# Altium PCB PCB1.PcbDoc
Units mil, origin at the board's own origin, x right, y up, seen from the top; angles counter-clockwise.
Board outline 6000 x 4000 mil, 2 copper layers (Top Layer, Bottom Layer); 57 components, 53 nets, 324 pads, 102 vias.
Unrouted connection lines stored in the file: 9.
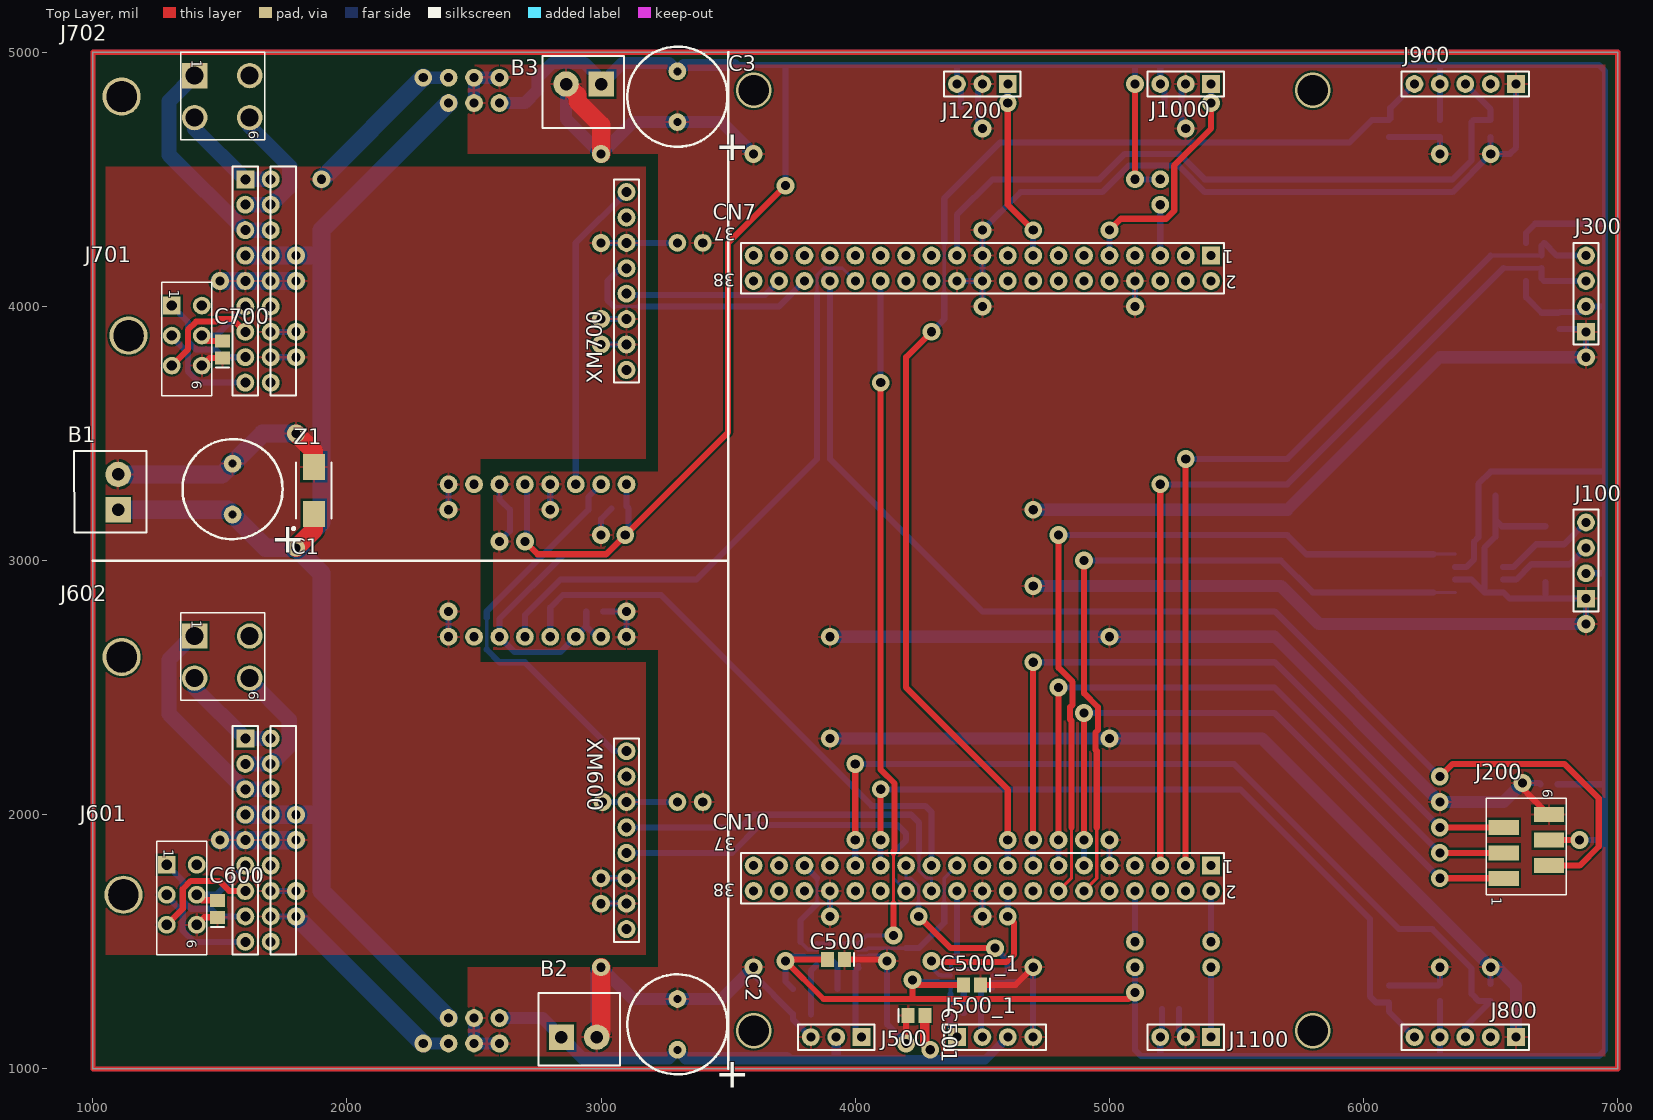
[diagram p0: Top Layer view]
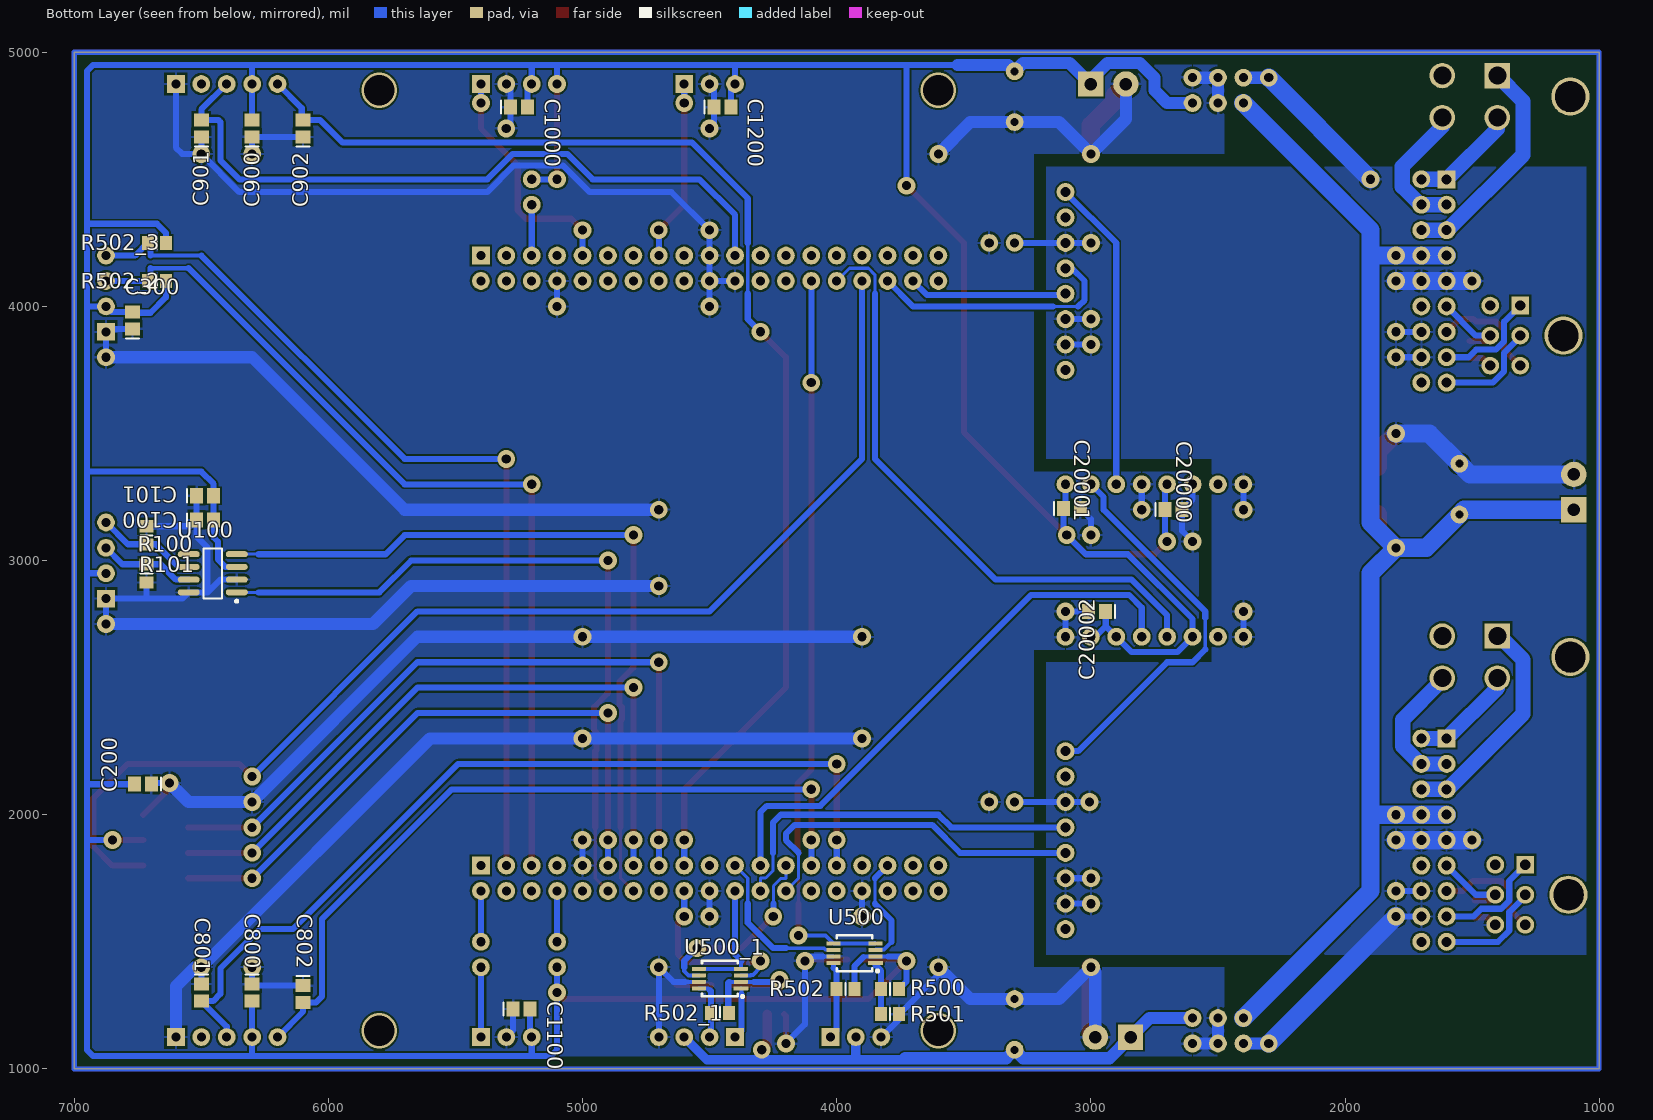
[diagram p1: Bottom Layer view, seen from below]
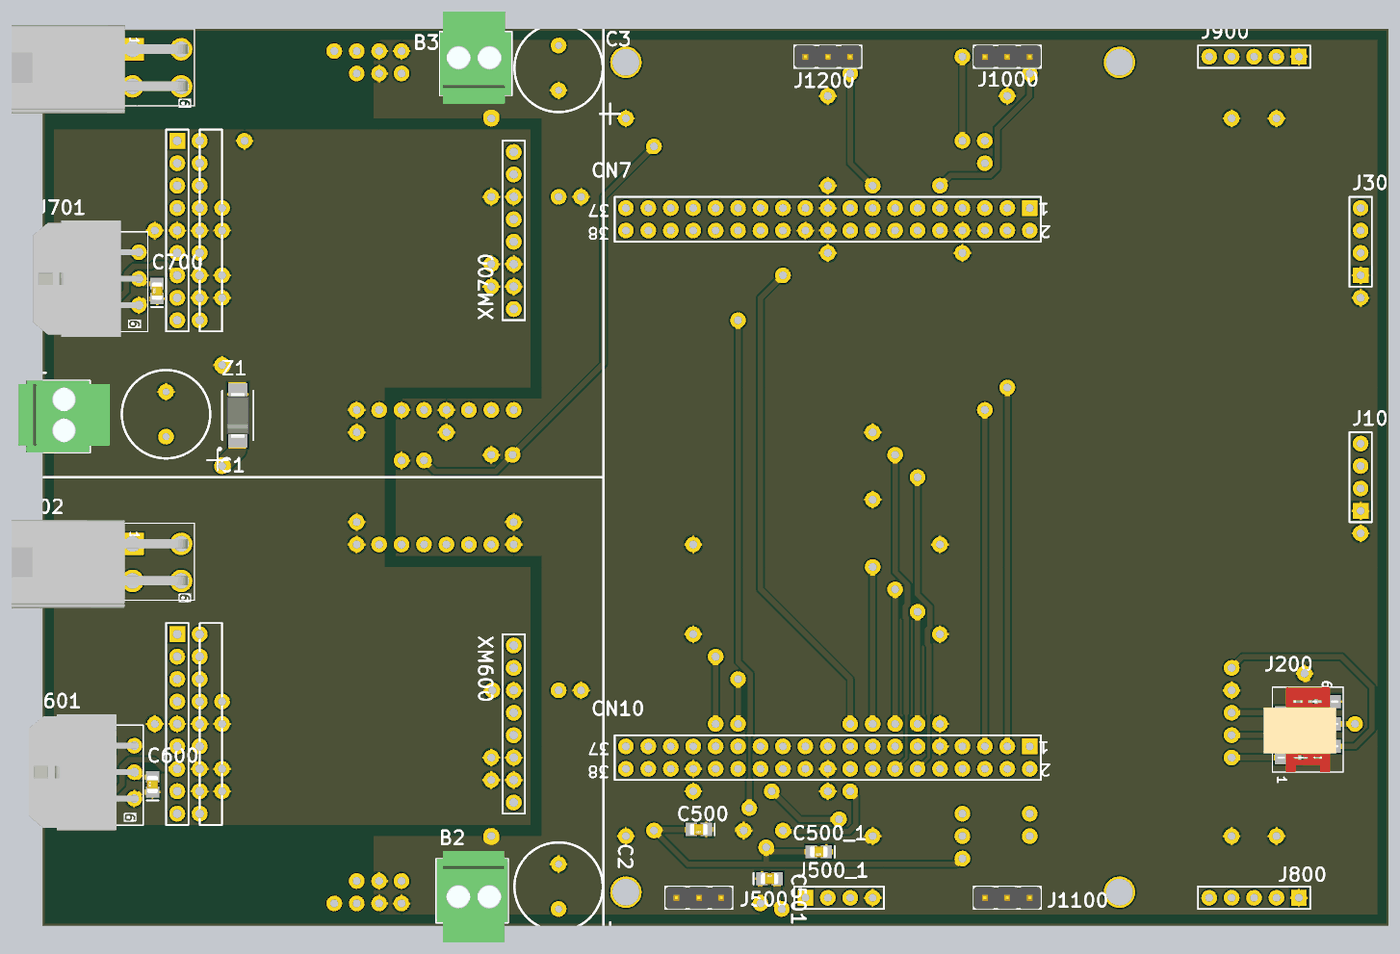
[diagram p2: 3D render of the assembled board from above, using the file's embedded part models]
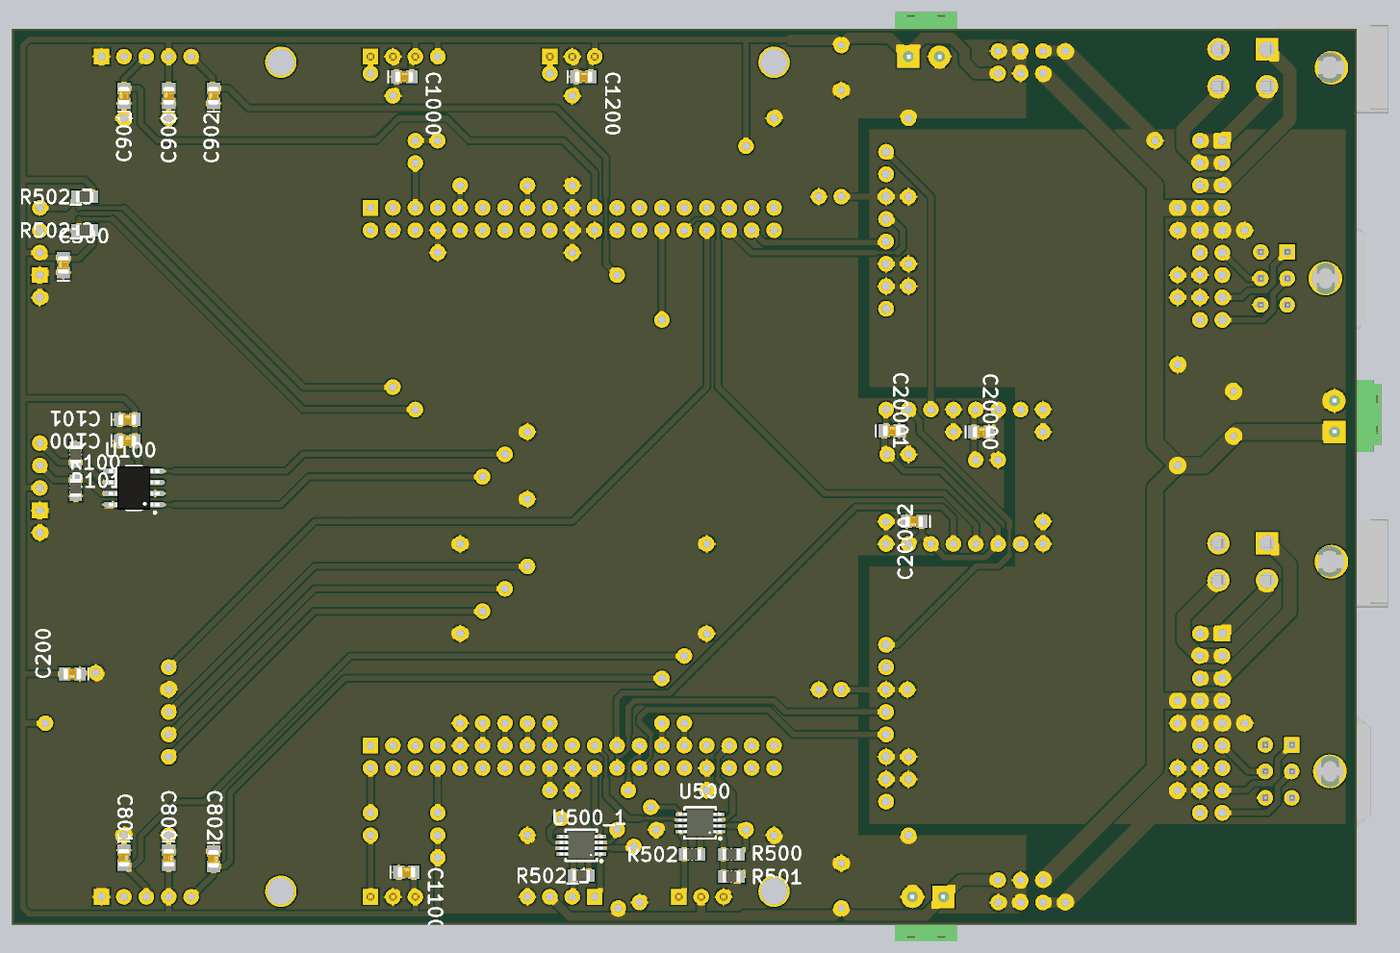
[diagram p3: 3D render of the assembled board from below, using the file's embedded part models]

## Layer stack, top to bottom
Top Solder: solder mask 0.4, Solder Resist, Dk 3.5
Top Layer: signal copper 1.4
Dielectric 1: dielectric 12.6, FR-4, Dk 4.8
Bottom Layer: signal copper 1.4
Bottom Solder: solder mask 0.4, Solder Resist, Dk 3.5

## Board outline
1000,1000 7000,1000 7000,5000 1000,5000

## Design rules (kind name [scope] priority, off if disabled: settings)
Clearance [All] p1: gap=8
PolygonConnect [All] p1: connectstyle=Relief reliefconductorwidth=10 reliefentries=4 polygonreliefangle="90 Angle" airgapwidth=10
RoutingVias [All] p1: holewidth=28 width=50 viastyle="Through Hole" minholewidth=6 minwidth=10 maxholewidth=5000 maxwidth=5000
SolderMaskExpansion [All] p1: expansion=4
Width [All] p1: maxlimit=1000 minlimit=10 preferedwidth=20
30 further rules are at their usual default settings.

## Classes and differential pairs
component class Feuille1: B1 B2 B3 C1 C2 C3 C100 C101 C200 C300 C500 C600 C700 C800 C801 C802 C900 C901 C902 CN7 CN10 J100 J200 J300 J500 J601 J602 J701 J702 J800 J900 J1000 J1100 J1200 R100 R101 R500 R501 R502 U100 U500 XM600 XM700 Z1

## Components (designator, comment, footprint, x,y, rotation, side; value= is the part's Value field where it differs from the comment)
B1 "1776275-2" BORNIER_2V_3.5MM 1100,3201 r90 top
B2 "1776275-2" BORNIER_2V_3.5MM 2845,1125 r0 top (schematic designator B3)
B3 "1776275-2" BORNIER_2V_3.5MM 3000,4875 r180 top (schematic designator B2)
C1 "1000µF" C_10mm 1550,3281 r270 top
C2 "1000µF" C_10mm 3300,1175 r270 top (schematic designator C3)
C3 "1000µF" C_10mm 3300,4825 r270 top (schematic designator C2)
C100 "1µF" C0805_N 6485,3160 r180 bottom
C101 "100nF" C0805_N 6485,3255 r180 bottom
C200 "1µF" C0805_N 6730,2120 r0 bottom
C300 "1µF" C0805_N 6770,3945 r90 bottom
C500 "100nF" C0805_N 3925,1430 r180 top
C500_1 "100nF" C0805_N 4460,1330 r180 top (schematic designator C500)
C501 "1µF" C0805_N 4240,1210 r0 top (schematic designator C300)
C600 "1µF" C0805_N 1490,1630 r90 top
C700 "1µF" C0805_N 1510,3830 r90 top
C800 "100nF" C0805_N 6300,1300 r270 bottom
C801 "100nF" C0805_N 6500,1300 r270 bottom
C802 "100nF" C0805_N 6100,1295 r270 bottom
C900 "100nF" C0805_N 6300,4700 r90 bottom
C901 "100nF" C0805_N 6500,4700 r90 bottom
C902 "100nF" C0805_N 6100,4700 r90 bottom
C1000 "1µF" C0805_N 5250,4785 r180 bottom (schematic designator C300)
C1100 "1µF" C0805_N 5240,1235 r180 bottom (schematic designator C300)
C1200 "1µF" C0805_N 4450,4785 r180 bottom (schematic designator C300)
C20000 "100nF" C0805_N 2675,3200 r180 bottom (schematic designator C500)
C20001 "100nF" C0805_N 3075,3205 r180 bottom (schematic designator C500)
C20002 "100nF" C0805_N 2975,2800 r0 bottom (schematic designator C500)
CN7 "SSW-119-01-T-D" "CONN RCPT .100\" 38POS DUAL TIN" 5400,4200 r180 top
CN10 "SSW-119-01-T-D" "CONN RCPT .100\" 38POS DUAL TIN" 5400,1800 r180 top
J100 "MC34645" HDR1X4 6875,2850 r90 top
J200 "partNo" 690367280676 6640,1875 r270 top
J300 "MC34645" HDR1X4 6875,3900 r90 top
J500 "0022053031" HDR1X3 4025,1125 r180 top
J500_1 "MC34645" HDR1X4 4400,1125 r0 top (schematic designator J100)
J601 "43045-0600" 43045-0600 1350,1685 r270 top
J602 "39-30-0040" 39-30-0040 1460,2585 r270 top
J701 "43045-0600" 43045-0600 1370,3885 r270 top
J702 "39-30-0040" 39-30-0040 1460,4790 r270 top
J800 "826949-5" HDR1X5 6600,1125 r180 top
J900 "826949-5" HDR1X5 6600,4875 r180 top
J1000 "0022053031" HDR1X3 5400,4875 r180 top
J1100 "0022053031" HDR1X3 5400,1125 r180 top
J1200 "0022053031" HDR1X3 4600,4875 r180 top
R100 "60" R0805_N 6715,2950 r90 bottom
R101 "60" R0805_N 6715,3099.57 r90 bottom
R500 "10k" R0805_N 3790,1315 r180 bottom
R501 "10k" R0805_N 3790,1215 r0 bottom
R502 "10k" R0805_N 3965,1315 r180 bottom
R502_1 "10k" R0805_N 4460,1220 r180 bottom (schematic designator R502)
R502_2 "10k" R0805_N 6675,4100 r180 bottom (schematic designator R502)
R502_3 "10k" R0805_N 6675,4250 r180 bottom (schematic designator R502)
U100 "MCP2551-I/SN" SO8_N 6455,2950 r0 bottom
U500 "MAX485CUA+" MMAX-8 3930,1455 r0 bottom
U500_1 "MAX485CUA+" MMAX-8 4460,1355 r0 bottom (schematic designator U500)
XM600 "380200" 380200_goldo 3100,1500 r90 top
XM700 "380200" 380200_goldo 3100,3700 r90 top
Z1 "SMBJ54A" "SMA Diode (DO-214AA)" 1870,3276 r90 top

## Footprints (in the part's own frame and the unit in brackets; to place one, negate y for a bottom-side part, rotate by r counter-clockwise, add the part's x,y. Pads: shape width x height; smd on the part's side, far side on the other; paste and mask are expansions set on the pad)
39-30-0040 [mm] "4 pins, straight"
  round 3.81 hole 3 slot 3.1 at 0 deg: 0(-0.9,-8.8)
  rect 2.54x2.54 hole 1.8: 1(-3,-1.5)
  round 2.54 hole 1.8: 2(-3,4) 3(1.2,-1.5) 4(1.2,4)
  silkscreen extent -5.33,-2.9 3.4,5.5, body extent -5.72,-15.19 4.28,4.74, height 11.4
43045-0600 [mm] "6 pins, straight"
  round 3.81 hole 3 slot 3.1 at 0 deg: 0(0,-5.825)
  rect 1.778x1.778 hole 1.02: 1(-3,-1.5)
  round 1.778 hole 1.02: 2(-3,1.5) 3(0,-1.5) 4(0,1.5) 5(3,-1.5) 6(3,1.5)
  silkscreen extent -5.33,-2.5 6,2.5, body extent -6.57,-10.45 6.58,1.79, height 9.83
380200_goldo [mm] "MAXON"
  rect 1.8x1.8 hole 1: 1(20.32,38.1)
  round 1.8 hole 1: 2(20.32,35.56) 3(17.78,38.1) 4(17.78,35.56) 5(15.24,38.1) 6(15.24,35.56) 7(12.7,38.1) 8(12.7,35.56) 9(10.16,38.1) 10(10.16,35.56) 11(7.62,38.1) 12(7.62,35.56) 13(5.08,38.1) 14(5.08,35.56) 15(2.54,38.1) 16(2.54,35.56) 17(0,38.1) 18(0,35.56) 19(1.27,0) 20(3.81,0) 21(6.35,0) 22(8.89,0) 23(11.43,0) 24(13.97,0) 25(16.51,0) 26(19.05,0)
  silkscreen extent -1.27,-1.27 21.59,39.37, body extent -1.27,-1.27 21.59,39.37
690367280676 [mm] "without Latch, 6 pins, SMT, straight"
  rect 1.5x3 smd: 1(3.175,-2.25) 2(1.905,2.25) 3(0.635,-2.25) 4(-0.635,2.25) 5(-1.905,-2.25) 6(-3.175,2.25)
  silkscreen extent -4.81,-4 4.81,4, body extent -4.81,-5 4.81,3.5, height 5.75
BORNIER_2V_3.5MM [mm]
  rect 2.54x2.54 hole 1.25: 1(-0.025,0)
  round 2.54 hole 1.25: 2(3.5,0)
  silkscreen extent -2.31,-2.82 5.84,4.39, body extent -2.27,-5.08 5.83,5.32, height 21.81
C0805_N [mm] "Chip Capacitor, Body 2.0x1.3mm, IPC Medium Density"
  rect 1.3x1.5 smd: 1(-0.85,0) 2(0.85,0)
  silkscreen extent -1.8,-0.65 -1.8,0.65, body extent -0.99,-0.63 1.01,0.63, height 0.8
C_10mm [mil]
  round 70 hole 31.5: 1(-100,0) 2(100,0)
  silkscreen extent -197,-197 197,197, body extent -196,-195 196,197, height 689
"CONN RCPT .100\" 38POS DUAL TIN" [mil]
  rect 70x70 hole 35.43: 1(0,0)
  round 70 hole 35.43: 2(0,100) 3(100,0) 4(100,100) 5(200,0) 6(200,100) 7(300,0) 8(300,100) 9(400,0) 10(400,100) 11(500,0) 12(500,100) 13(600,0) 14(600,100) 15(700,0) 16(700,100) 17(800,0) 18(800,100) 19(900,0) 20(900,100) 21(1000,0) 22(1000,100) 23(1100,0) 24(1100,100) 25(1200,0) 26(1200,100) 27(1300,0) 28(1300,100) 29(1400,0) 30(1400,100) 31(1500,0) 32(1500,100) 33(1600,0) 34(1600,100) 35(1700,0) 36(1700,100) 37(1800,0) 38(1800,100)
  silkscreen extent -50,-50 1850,150
HDR1X3 [mil]
  rect 70x70 hole 35.43: 1(0,0)
  round 70 hole 35.43: 2(100,0) 3(200,0)
  silkscreen extent -50,-50 250,50, body extent -50,-50 250,50, height 398
HDR1X4 [mil]
  rect 70x70 hole 35.43: 1(0,0)
  round 70 hole 35.43: 2(100,0) 3(200,0) 4(300,0)
  silkscreen extent -50,-50 350,50
HDR1X5 [mil]
  rect 70x70 hole 35.43: 1(0,0)
  round 70 hole 35.43: 2(100,0) 3(200,0) 4(300,0) 5(400,0)
  silkscreen extent -50,-50 450,50
MMAX-8 [mm]
  rrect30% 1.5x0.4 smd: 1(-2.1,0.975)
  rrect30% 1.4x0.4 smd: 2(-2.1,0.325) 3(-2.1,-0.325) 4(-2.1,-0.975) 5(2.1,-0.975) 6(2.1,-0.325) 7(2.1,0.325)
  rrect20% 1.4x0.4 smd: 8(2.1,0.975)
  silkscreen extent -2.41,-1.78 1.78,1.9, body extent -2.46,-1.5 2.46,1.5, height 1.1
R0805_N [mm] "Chip Resistor, Body 2.0x1.3mm, IPC Medium Density"
  rect 1.2x1.4 smd: 1(-0.9,0) 2(0.9,0)
  silkscreen extent 0,-0.6 0,0.6, body extent -1.07,-0.7 1.07,0.7, height 0.65
"SMA Diode (DO-214AA)" [mm] "Case DO-214AA"
  rect 2.6x2.2 smd: 1(2.35,0) 2(-2.35,0)
  silkscreen extent -3.93,-1.78 2.79,2.16, body extent -2.8,-1.46 2.79,1.46, height 2.41
SO8_N [mm] "8-Pin Small Outline Integrated Circuit 1.27 mm Pitch, IPC Medium Density"
  oval 2.2x0.6 smd: 1(-2.4,1.905) 2(-2.4,0.635) 3(-2.4,-0.635) 4(-2.4,-1.905) 5(2.4,-1.905) 6(2.4,-0.635) 7(2.4,0.635) 8(2.4,1.905)
  silkscreen extent -2.51,-2.5 0.9,2.92, body extent -2.89,-2.45 2.89,2.46, height 1.75

## Part data
B1 B2 B3: "TERM BLOCK 2POS SIDE ENT 3.5MM"
C1 C2 C3: library part C_1000µF
C100 C101 C200 C300 C500 C500_1 C501 C600 C700 C800 C801 C802 C900 C901 C902 C1000 C1100 C1200 C20000 C20001 C20002: library part Condensateur, "Capacitor"
CN7 CN10: "CONN RCPT .100\" 38POS DUAL TIN"
J100 J300 J500_1: "MULTICOMP - MC34645 - EMB. MALE COUDEE  CON. MALE 2.54MM 4VOIE"
J200: library part "WE-WR-MM Female SMT Connector with Polarization 690367280676", "WR-MM Female SMT Connector with Polarization"
J500 J1000 J1100 J1200: "CONN HEADER 3POS .100 R/A TIN"
J601 J701: "CONN HEADER 6POS 3MM RT ANG TIN"
J602 J702: "MOLEX  39-30-0040 4.2 mm, 4 Contact(s)"
J800 J900: "CONN HEADER BRKWY 5POS R/A TIN"
R100 R101 R500 R501 R502 R502_1 R502_2 R502_3: library part Resistor, "Resistor"
U100: "IC TRANSCEIVER CAN HI-SPD 8-SOIC"
U500 U500_1: "IC TXRX RS485/RS422 8-UMAX"
XM600 XM700: "DEC Module 50/5, amplificateur EC 1 Q 50 V / 5 A, régulation de vitesse, module OEM"
Z1: "DIODE TVS (Transil unidirectionelle)"

## Free pads (board coordinates)
  round 70 hole 36: ""(2400,1100) ""(2400,1200) ""(2400,2700) ""(2400,3300) ""(2400,4800) ""(2400,4900) ""(2500,1100) ""(2500,1200) ""(2500,2700) ""(2500,3300) ""(2500,4800) ""(2500,4900) ""(2600,1200) ""(2600,2700) ""(2600,3300) ""(2600,4800) ""(2700,2700) ""(2700,3300) ""(2800,2700) ""(2800,3300) ""(2900,2700) ""(2900,3300) ""(3000,2700) ""(3000,3300) ""(3100,2700) ""(3100,3300) ""(3300,2050) ""(3300,4250) ""(3400,2050) ""(3400,4250) ""(5100,1400) ""(5100,1500) ""(5200,4400) ""(5200,4500) ""(5400,1400) ""(5400,1500)

## Via types
v1: diameter 70, hole 36, Top Layer to Bottom Layer, 98 vias
v2: diameter 140, hole 120, Top Layer to Bottom Layer, 4 vias

## Nets (pads, with @x,y where several pads share a name; then routed paths per layer and width w, separated by ;. In a path a pad name is that pad's centre, name@x,y a point inside that pad or via, vN(x,y) a via of type N, cw(c..) or ccw(c..) an arc to the next point about the centre after c; other vN are vias at no path point)
5V: B3.1 C3.1 C100.2 C101.2 C200.2 C300.2 C500.2 C500_1.2 C800.2 C900.2 C1000.2 C1100.2 C1200.2 C20000.1 C20001.1 C20002.1 CN7.5 CN10.8 J100.2 J200.4 J300.2 J800.4 J900.4 J1000.3 J1100.3 J1200.3 pad.@2600,2700 pad.@2600,4800 pad.@2700,3300 pad.@2900,2700 pad.@3000,2700 pad.@3100,3300 pad.@5100,1400 pad.@5100,1500 pad.@5200,4400 pad.@5200,4500 R500.2 R502.2 R502_1.2 R502_2.2 R502_3.2 U100.3 U500.2 U500_1.2 | length 21588.6
  Top Layer w24: v1(2700,3075) 2750,3025 3020,3025 v1(3095,3100) 3500,3505 3500,4250 v1(3725,4475) ; v1(3725,1425) 3875,1275 4225,1275 ; v1@3730,1430 C500.2 ; C500_1.2 4245,1330 v1(4225,1350) 4225,1275 ; v1(5100,1300) 5075,1275 4225,1275 ; v1(5100,4500) v1(5100,4875) ; J200.4 v1(6850,1900)
  Bottom Layer w16: 3797.2,1442.2 U500.2 3892.8,1442.2 3895,1440 ; 4325,1342.2 U500_1.2 4422.8,1342.2
  Bottom Layer w24: v1(2700,3075) 2708.46,3083.46 C20000.1 2708.46,3291.54 pad.@2700,3300 ; C20002.1 2941.54,2741.54 ; pad.@3000,2700 2983.07,2700 2941.54,2741.54 ; pad.@3100,3300 3100,3213.46 C20001.1 3108.46,3113.46 v1(3095,3100) 3020,3025 2855,3025 2600,2770 2600,2700 2660,2640 2840,2640 2900,2700 2941.54,2741.54 ; 3525,4950 3725,4950 ; v1(3725,4475) 3725,4950 ; R500.2 3725,1344.57 v1(3725,1425) 3742.2,1442.2 3797.2,1442.2 ; 3895,1440 3929.57,1405.43 R502.2 ; v1(4225,1350) 4232.8,1342.2 4325,1342.2 ; C1200.2 4416.54,4858.46 J1200.3 4400,4950 ; 4422.8,1342.2 4426.85,1338.15 4426.85,1220 R502_1.2 ; pad.@5100,1400 v1(5100,1300) 5100,1075 5125,1050 5200,1050 ; pad.@5100,1500 CN10.8 ; v1(5100,4500) pad.@5200,4500 ; v1(5100,4875) 5100,4950 ; CN7.5 pad.@5200,4400 ; C1100.2 5206.54,1131.54 J1100.3 5200,1050 ; C1000.2 5216.54,4858.46 J1000.3 5200,4950 ; C800.2 J800.4 6300,1050 ; C900.2 J900.4 6300,4950 ; U100.3 6405,2975 6435,3005 6435,3075 6451.54,3091.54 C100.2 C101.2 6451.54,3301.54 6500,3350 6950,3350 ; R502_2.2 6639.57,4035.43 6700,3975 6766.54,3975 C300.2 6853.46,3978.46 J300.2 6950,4000 ; R502_3.2 6639.57,4289.57 6675,4325 6950,4325 ; C200.2 6950,2120 ; v1(6850,1900) 6950,1900 ; J100.2 6950,2950 ; 3725,4950 4400,4950 ; 4400,4950 5100,4950 ; 5100,4950 5200,4950 ; 5200,1050 6300,1050 ; 5200,4950 6300,4950 ; 6300,1050 6925,1050 6950,1075 6950,1900 ; 6300,4950 6925,4950 6950,4925 6950,4325 ; 6950,1900 6950,2120 ; 6950,2120 6950,2950 ; 6950,2950 6950,3350 ; 6950,3350 6950,4000 ; 6950,4000 6950,4325
  Bottom Layer w48: pad.@2600,4800 2700,4800 2750,4850 2750,4900 2808,4958 2935,4958 3001,4892 B3.1 3084,4958 3267,4958 C3.1 3325,4950 3525,4950
12V: B2.1 C2.2 C501.2 J500.2 J500_1.3 pad.@2600,1200 | length 2370.1
  Top Layer w36: C501.2@4273.46,1215 4273.46,1096.54 v1(4295,1075)
  Bottom Layer w36: 3732,1040 3736,1036 3925,1036 ; J500.2 3925,1036 ; J500_1.3 4511,1036 3925,1036
  Bottom Layer w40: 3730,1042 3732,1040
  Bottom Layer w48: pad.@2600,1200 2769,1200 B2.1 2927,1042 3267,1042 C2.2 3333,1042 3730,1042
24V: B1.1 C1.2 pad.@2400,1200 pad.@2400,4800 XM600.7 XM600.8 XM700.7 XM700.8 Z1.2 | length 5621.7
  Top Layer w72: v1(1800,3050) 1870,3120 Z1.2
  Bottom Layer w72: B1.1 1531,3200 C1.2 1681,3050 v1(1800,3050) ; XM600.7 XM600.8 v1(1800,2000) 1900,2000 ; XM700.7 XM700.8 v1(1800,4200) 1900,4200 ; pad.@2400,1200 1900,1700 1900,2000 ; pad.@2400,4800 1900,4300 1900,4200 ; v1(1800,3050) 1900,3150 1900,4200 ; v1(1800,3050) 1900,2950 1900,2000
CANH: J100.3 R100.2 U100.7 | length 377.3
  Bottom Layer w24: U100.7 6600,2925 6660.43,2985.43 R100.2 6810.43,2985.43 J100.3
CANL: J100.4 R101.1 U100.6 | length 398
  Bottom Layer w24: U100.6 6590,2975 6679.13,3064.13 R101.1 6789.13,3064.13 J100.4
DYNAMIXEL_D: J500.1 R502.1 U500.8 | length 300.2
  Bottom Layer w18: 4012.68,1397.68 U500.8@4012.68,1410
  Bottom Layer w24: 4012.68,1397.68 4000.43,1385.43 R502.1 4000.43,1149.57 J500.1
DYNAMIXEL_D_1_N: J500_1.1 U500_1.1 | length 202.9
  Bottom Layer w16: 4375,1295 4375,1314.29 U500_1.1
  Bottom Layer w24: 4375,1295 4375,1150 J500_1.1
DYNAMIXEL_D_1_P: J500_1.2 R502_1.1 U500_1.8 | length 234.2
  Bottom Layer w16: 4500,1310 4506.61,1316.61 U500_1.8
  Bottom Layer w24: J500_1.2 4495.43,1129.57 R502_1.1 4495.43,1305.43 4500,1310
GND: B2.2 B3.2 C2.1 C3.2 C100.1 C101.1 C200.1 C300.1 C500.1 C500_1.1 C501.1 C800.1 C801.1 C802.1 C900.1 C901.1 C902.1 C1000.1 C1100.1 C1200.1 C20000.2 C20001.2 C20002.2 CN7.8 CN7.19 CN7.20 CN7.22 CN10.9 CN10.20 CN10.32 J100.1 J200.6 J300.1 J500.3 J500_1.4 J800.1 J900.1 J1000.2 J1100.2 J1200.2 pad.@2500,1100 pad.@2500,1200 pad.@2500,4800 pad.@2500,4900 pad.@2600,3300 pad.@2800,3300 pad.@3100,2700 pad.@3400,2050 pad.@3400,4250 R100.1 R101.2 R501.1 U100.2 U100.8 U500.7 U500_1.7 | length 62849.8
  Top Layer w20: 1000,1000 1000,5000 7000,5000 7000,1000 1000,1000
  Top Layer w24: C500.1 4120,1430 v1(4125,1425) ; v1(4200,1100) 4200,1208.46 C501.1@4206.54,1215 ; C500_1.1 4630,1330 v1(4700,1400) ; v1(6625,2125) 6625,2103.58 J200.6
  Top Layer w72: B3.2 2907,4830.2 2907,4806.77 3000,4713.77 v1(3000,4600) ; B2.2 3000,1142.2 v1(3000,1400)
  Bottom Layer w16: U500.7 4055,1442.2 ; U500_1.7 4597.2,1342.2
  Bottom Layer w20: 1000,1000 7000,1000 7000,5000 1000,5000 1000,1000
  Bottom Layer w24: v1(2600,3075) 2641.54,3116.54 C20000.2 2600,3241.54 pad.@2600,3300 ; v1@2800,3175 v1(2800,3200) pad.@2800,3300 ; v1(3000,3100) 3000,3163.46 C20001.2 ; C20002.2 v1(3100,2800) pad.@3100,2700 ; v1(3600,1400) 3600,1369.57 R501.1 3754.57,1195.43 J500.3 ; v1(3900,1600) CN10.32 ; 4055,1442.2 4107.8,1442.2 v1(4125,1425) 4125,1175 v1(4200,1100) ; CN7.22 CN7.20 ; v1(4500,1600) CN10.20 ; v1(4500,4000) CN7.20 ; v1(4500,4700) 4483.46,4716.54 C1200.1 4483.46,4858.46 J1200.2 ; 4597.2,1342.2 4642.2,1342.2 v1(4700,1400) J500_1.4 ; CN10.9 v1(5000,1900) ; v1(5100,4000) CN7.8 ; C1100.1 5273.46,1151.54 J1100.2 ; v1(5300,4700) 5283.46,4716.54 C1000.1 5283.46,4858.46 J1000.2 ; C802.1 6295,1328.46 C800.1 v1(6300,1400) ; C902.1 C900.1 v1(6300,4600) ; U100.2 6425,2925 6475,2875 ; C801.1 v1(6500,1400) v1@6525,1400 ; C901.1 v1(6500,4600) ; C101.1 C100.1 ; J900.1 6600,4625 6575,4600 v1(6500,4600) ; v1(6625,2125) 6691.54,2125 C200.1 ; R100.1 6715,2850 ; R101.2 6543.46,3135 C100.1 ; C300.1 6863.46,3911.54 J300.1 v1(6875,3800) ; v1(6875,2750) J100.1 6715,2850 ; CN7.20 CN7.19 v1(4500,4300) 4650,4450 4972.22,4450 5077.22,4555 5270,4555 5375,4450 6350,4450 v1(6500,4600) ; 6475,2875 6475,3050 6518.46,3093.46 C100.1 ; 6475,2875 U100.8 6574.49,2850 6715,2850
  Bottom Layer w48: pad.@2500,1200 2500,1100 v1(2600,1100) ; pad.@2500,4800 2500,4900 v1(2600,4900) ; B3.2 2862.2,4737.8 v1(3000,4600) 3125,4725 C3.2 3475,4725 v1(3600,4600) ; B2.2 2982.8,1382.8 v1(3000,1400) 3125,1275 C2.1 3475,1275 v1(3600,1400) ; v1(3900,2300) 5600,2300 v1(6500,1400) ; v1(3900,2700) v1(5000,2700) 5650,2700 v1(6300,2050) 6550,2050 v1(6625,2125) ; v1(4700,2900) 5675,2900 5825,2750 v1(6875,2750) ; v1(4700,3200) 5700,3200 6300,3800 v1(6875,3800) ; v1@6525,1400 6600,1325 J800.1
  other v1: 5000,2300
GND_PWR: B1.2 C1.1 C600.1 C700.1 J601.6 J701.6 pad.@2400,1100 pad.@2400,2700 pad.@2400,3300 pad.@2400,4900 pad.@3300,2050 pad.@3300,4250 XM600.9 XM600.10 XM600.14 XM600.16 XM600.20 XM600.21 XM600.24 XM700.9 XM700.10 XM700.14 XM700.16 XM700.20 XM700.21 XM700.24 Z1.1 | length 4781.5
  Top Layer w24: J601.6 1438.7,1596.54 C600.1 ; J701.6 1458.7,3796.54 C700.1
  Top Layer w72: v1(1800,3500) 1870,3430 Z1.1
  Bottom Layer w24: XM600.16 v1(1800,1600) ; XM600.14 v1(1800,1700) ; XM700.16 v1(1800,3800) ; XM700.14 v1(1800,3900) ; pad.@2400,2700 v1(2400,2800) ; v1(2400,3200) pad.@2400,3300 ; v1(3000,1650) XM600.20 ; v1(3000,1750) XM600.21 ; v1(3000,3850) XM700.20 ; v1(3000,3950) XM700.21 ; v1(3000,4250) XM700.24 pad.@3300,4250 ; v1(3005,2050) XM600.24 pad.@3300,2050
  Bottom Layer w48: v1(2300,1100) pad.@2400,1100 ; v1(2300,4900) pad.@2400,4900
  Bottom Layer w72: B1.2 1507.8,3338.8 C1.1 1669,3500 v1(1800,3500) ; v1(1500,1900) XM600.9 XM600.10 v1(1800,1900) ; v1(1500,4100) XM700.9 XM700.10 v1(1800,4100) ; v1(1800,1600) v1(2300,1100) ; v1(1900,4500) v1(2300,4900)
M1_H1: J601.5 XM600.13 | length 442.9
  Top Layer w24: J601.5 1354.06,1630 1354.06,1707.78 1386.27,1740 1496.87,1740 1536.87,1700 XM600.13
M1_H2: J601.1 XM600.15 | length 438.7
  Bottom Layer w24: J601.1 1354.06,1740 1354.06,1662.22 1386.27,1630 1464.06,1630 1494.06,1600 XM600.15
M1_H3: J601.3 XM600.17 | length 431.2
  Bottom Layer w24: J601.3 1290.94,1680.07 1354.06,1616.96 1354.06,1544.11 1398.16,1500 XM600.17
M1_VCC_H: C600.2 J601.4 pad.@2500,2700 XM600.11 | length 328.4
  Top Layer w24: J601.4 1430.59,1663.46 C600.2
  Bottom Layer w24: J601.4 1485,1685 XM600.11
M1_W1: J602.3 XM600.1 XM600.2 | length 420.2
  Bottom Layer w60: J602.3 1400.94,2499.06 XM600.1 XM600.2
M1_W2: J602.4 XM600.3 XM600.4 | length 535
  Bottom Layer w60: XM600.3 XM600.4 1703.85,2200 1773.43,2269.58 1773.43,2373.43 1617.48,2529.39 J602.4
M1_W3: J602.1 XM600.5 XM600.6 | length 876
  Bottom Layer w60: J602.1 1393.11,2703.11 1300,2610 1300,2396.15 1596.15,2100 XM600.5 XM600.6
M2_H1: J701.5 XM700.13 | length 431.2
  Top Layer w24: J701.5 1374.06,3830 1374.06,3907.78 1406.27,3940 1484.06,3940 1494.06,3950 1550,3950 XM700.13
M2_H2: J701.1 XM700.15 | length 418.7
  Bottom Layer w24: J701.1 1374.06,3940 1374.06,3862.22 1406.27,3830 1484.06,3830 1514.06,3800 XM700.15
M2_H3: J701.3 XM700.17 | length 411.2
  Bottom Layer w24: J701.3 1310.94,3880.07 1374.06,3816.96 1374.06,3744.11 1418.16,3700 XM700.17
M2_VCC_H: C700.2 J701.4 pad.@2500,3300 XM700.11 | length 308.4
  Top Layer w24: J701.4 1450.59,3863.46 C700.2
  Bottom Layer w24: J701.4 1485,3885 XM700.11
M2_W1: J702.3 XM700.1 XM700.2 | length 425.2
  Bottom Layer w60: J702.3 1400.94,4699.06 XM700.1 XM700.2
M2_W2: J702.4 XM700.3 XM700.4 | length 541.3
  Bottom Layer w60: XM700.3 XM700.4 1703.85,4400 1775,4471.15 1775,4550 1617.48,4707.52 J702.4
M2_W3: J702.1 XM700.5 XM700.6 | length 876.4
  Bottom Layer w60: J702.1 1300,4807.17 1300,4596.15 1596.15,4300 XM700.5 XM700.6
NetR500_1: R500.1 R501.2 U500.1 | length 210.7
  Bottom Layer w12: 3847.32,1407.32 U500.1
  Bottom Layer w24: R501.2 R500.1 3825.43,1385.43 3847.32,1407.32
STM32_PA0_MAX485_DIR: CN7.28 U500.4 U500.5 | length 2917.9
  Top Layer w12: 4150,1650 4150,1850
  Top Layer w24: v1(4100,3700) 4100,2177.78 4155,2122.78 4155,1861.11 4150,1856.11 4150,1850 ; v1(4150,1525) 4150,1650
  Bottom Layer w16: U500.4@3848.81,1495 3847.32,1493.51 4012.68,1493.51 U500.5 4044.29,1525 v1(4150,1525)
  Bottom Layer w24: v1(4100,3700) CN7.28
STM32_PA1_MAXON2_PWM: CN7.30 pad.@2700,2700 pad.@2900,3300 XM700.26 | length 3628.7
  Bottom Layer w12: 3850,4050 3850,4125 3875,4150 3950,4150 CN7.30
  Bottom Layer w24: pad.@2700,2700 2700,2785 2840,2925 3375,2925 3850,3400 3850,4050 ; pad.@2900,3300 2900,4250 XM700.26
STM32_PA4_SPI1_NSS: CN7.32 J200.2 | length 4736.9
  Top Layer w24: v1(6300,2150) 6350,2200 6790,2200 6925,2065 6925,1875 6850,1800 J200.2
  Bottom Layer w24: CN7.32 3900,3400 4500,2800 5650,2800 v1(6300,2150)
STM32_PA5_SPI1_SCK: CN10.11 J200.1 | length 2520.7
  Top Layer w24: v1(4900,1900) v1(4900,2400) ; v1(6300,1750) J200.1
  Bottom Layer w24: CN10.11 v1(4900,1900) ; v1(4900,2400) 5650,2400 v1(6300,1750)
STM32_PA6_SPI1_MISO: CN10.13 J200.3 | length 2720.7
  Top Layer w24: v1(4800,1900) v1(4800,2500) ; v1(6300,1850) J200.3
  Bottom Layer w24: CN10.13 v1(4800,1900) ; v1(4800,2500) 5650,2500 v1(6300,1850)
STM32_PA7_SPI1_MOSI: CN10.15 J200.5 | length 2920.7
  Top Layer w24: v1(4700,1900) v1(4700,2600) ; v1(6300,1950) J200.5
  Bottom Layer w24: CN10.15 v1(4700,1900) ; v1(4700,2600) 5650,2600 v1(6300,1950)
STM32_PA8_MAXON1_PWM: CN10.23 pad.@2800,2700 pad.@3000,3300 XM600.26 | length 3751.9
  Bottom Layer w12: 2550,2650 2550,2775
  Bottom Layer w24: 2550,2650 2600,2600 2700,2600 3050,2250 XM600.26 ; 2550,2775 2550,2800 2950,3200 2950,3250 pad.@3000,3300 ; pad.@2800,2700 2800,2815 2850,2865 3235,2865 4065,2035 4275,2035 4300,2010 CN10.23
STM32_PA9_MAX485_TX: CN10.21 U500.6 | length 628.3
  Bottom Layer w12: 4350,1650 4350,1750 CN10.21
  Bottom Layer w14: U500.6 4012.68,1469.2 4044.2,1469.2 4050,1475 4200,1475
  Bottom Layer w24: 4200,1475 4250,1475 4350,1575 4350,1650
STM32_PA10_MAX485_RX: CN10.33 U500.3 | length 424.3
  Bottom Layer w12: 3850,1650 3850,1750
  Bottom Layer w16: 3784.52,1499.52 3814.52,1469.51 3845.61,1469.51 U500.3
  Bottom Layer w24: 3784.52,1499.52 3784.52,1584.52 3850,1650 ; CN10.33 3850,1750
STM32_PA11_CAN1_RX: CN10.14 U100.4 | length 3041.3
  Top Layer w12: CN10.14 4850,1750 4850,1950
  Top Layer w24: v1(4800,3100) 4800,2577.78 4855,2522.78 4855,2432.78 4845,2422.78 4845,2375 4850,2370 4850,1950
  Bottom Layer w12: 6275,3025 U100.4
  Bottom Layer w24: v1(4800,3100) 5700,3100 5775,3025 6275,3025
STM32_PA12_CAN1_TX: CN10.12 U100.1 | length 2862
  Top Layer w12: CN10.12 4950,1750 4950,1950
  Top Layer w24: v1(4900,3000) 4900,2477.78 4955,2422.78 4955,2332.78 4945,2322.78 4945,2255 4950,2250 4950,1950
  Bottom Layer w12: 6275,2875 U100.1
  Bottom Layer w24: v1(4900,3000) 5675,3000 5800,2875 6275,2875
STM32_PA14_SERVO12_PWM: CN7.15 J1200.1 | length 716.4
  Top Layer w24: v1(4600,4800) 4600,4400 v1(4700,4300)
  Bottom Layer w24: v1(4600,4800) J1200.1 ; CN7.15 v1(4700,4300)
STM32_PB0_MAXON2_DIR: CN7.34 XM700.23 | length 997.5
  Bottom Layer w12: 3050,4000 3150,4000
  Bottom Layer w24: 3050,4000 3025,4025 3025,4100 3075,4150 XM700.23 ; 3150,4000 3700,4000 CN7.34
STM32_PB1_MAXON1_DIR: CN10.24 XM600.23 | length 1485.7
  Bottom Layer w12: 4250,1850 4250,1780.7 4279.7,1751 4300,1751 CN10.24
  Bottom Layer w24: XM600.23 3550,1950 3600,2000 4220,2000 4250,1970 4250,1850
STM32_PB2_MAX485_DIR: CN10.22 U500_1.4 U500_1.5 | length 483.3
  Bottom Layer w16: 4375,1425 4377.32,1422.68 U500_1.4 U500_1.5
  Bottom Layer w24: 4375,1425 4400,1450 CN10.22
STM32_PB4_QEI1_CH_A: C802.2 CN10.27 J800.5 | length 3003.9
  Top Layer w24: v1(4100,1900) v1(4100,2100)
  Bottom Layer w24: CN10.27 v1(4100,1900) ; v1(4100,2100) 5515,2100 6025,1590 6025,1285 6048.46,1261.54 C802.2 6100,1225 J800.5
STM32_PB5_QEI1_CH_B: C801.2 CN10.29 J800.3 | length 3528.2
  Top Layer w24: v1(4000,1900) v1(4000,2200)
  Bottom Layer w24: CN10.29 v1(4000,1900) ; v1(4000,2200) 5490,2200 6140,1550 6270,1550 6425,1395 6425,1295 6453.46,1266.54 C801.2 6400,1166.54 J800.3
STM32_PB6_QEI2_CH_A: C902.2 CN10.17 J900.5 | length 4913.5
  Top Layer w24: v1(4300,3900) 4200,3800 4200,2500 4600,2100 v1(4600,1900)
  Bottom Layer w12: 4350,4050 4350,4250
  Bottom Layer w24: v1(4300,3900) 4350,3950 4350,4050 ; 4350,4250 4350,4425 4570,4645 5945,4645 6033.46,4733.46 C902.2 6105,4738.46 6105,4780 J900.5 ; CN10.17 v1(4600,1900)
STM32_PB7_QEI2_CH_B: C901.2 CN7.21 J900.3 | length 2768.4
  Bottom Layer w24: CN7.21 4400,4360 4540,4500 4960,4500 5060,4600 5275,4600 5375,4500 6350,4500 6425,4575 6425,4725 6433.46,4733.46 C901.2 6500,4775 J900.3
STM32_PB8_I2C1_SCL: CN10.3 J300.4 R502_3.1 | length 3571
  Top Layer w24: CN10.3 v1(5300,3400)
  Bottom Layer w16: 6500,4200 6700,4200
  Bottom Layer w24: v1(5300,3400) 5700,3400 6500,4200 ; 6700,4200 6700,4239.57 R502_3.1 6760.43,4200 J300.4
STM32_PB9_I2C1_SDA: CN10.5 J300.3 R502_2.1 | length 3571
  Top Layer w24: CN10.5 v1(5200,3300)
  Bottom Layer w16: 6550,4150 6700,4150
  Bottom Layer w24: v1(5200,3300) 5700,3300 6550,4150 ; 6700,4150 6700,4110.43 R502_2.1 J300.3
STM32_PB10_MAX485_TX: CN10.25 U500_1.6 | length 761.2
  Top Layer w24: v1(4250,1600) 4375,1475 v1(4550,1475)
  Bottom Layer w12: CN10.25 4200,1749 4220.3,1749 4249,1720.3 4249,1651 4250,1650
  Bottom Layer w16: U500_1.6 4583.2,1367.8 4600,1384.6 4600,1400
  Bottom Layer w24: 4249,1651 4249,1601 v1(4250,1600) ; v1(4550,1475) 4600,1425 4600,1400
STM32_PB11_MAX485_RX: CN10.18 U500_1.3 | length 715.5
  Top Layer w24: v1(4300,1425) 4305,1420 4595,1420 4625,1450 4625,1575 v1(4600,1600)
  Bottom Layer w16: v1(4300,1425) 4300,1400 4329.8,1370.2 4336.6,1370.2 4339.01,1367.8 U500_1.3
  Bottom Layer w24: v1(4600,1600) CN10.18
STM32_PB15_MAXON1_EN: CN10.26 XM600.22 | length 1426.5
  Bottom Layer w12: 4150,1850 4150,1750 CN10.26
  Bottom Layer w24: XM600.22 3515,1850 3625,1960 4165,1960 4200,1925 4200,1900 4150,1850
STM32_PC1_MAXON2_EN: CN7.36 XM700.22 | length 624.9
  Bottom Layer w24: XM700.22 3105,4045 3645,4045 CN7.36
STM32_PC8_SERVO11_PWM: CN10.2 J1100.1 pad.@5400,1400 pad.@5400,1500 | length 475
  Bottom Layer w24: J1100.1 pad.@5400,1400 ; pad.@5400,1500 CN10.2
STM32_PF6_SERVO10_PWM: CN7.9 J1000.1 | length 944.8
  Top Layer w24: v1(5000,4300) 5045,4345 5222.78,4345 5255,4377.22 5255,4555 5400,4700 v1(5400,4800)
  Bottom Layer w24: CN7.9 v1(5000,4300) ; v1(5400,4800) J1000.1
STM32_PF7_SERVO11_PWM: CN7.11
pads on no net: CN7.1 CN7.2 CN7.3 CN7.4 CN7.6 CN7.7 CN7.10 CN7.12 CN7.13 CN7.14 CN7.16 CN7.17 CN7.18 CN7.23 CN7.24 CN7.25 CN7.26 CN7.27 CN7.29 CN7.31 CN7.33 CN7.35 CN7.37 CN7.38 CN10.1 CN10.4 CN10.6 CN10.7 CN10.10 CN10.16 CN10.19 CN10.28 CN10.30 CN10.31 CN10.34 CN10.35 CN10.36 CN10.37 CN10.38 J601.0 J601.2 J602.0 J602.2 J701.0 J701.2 J702.0 J702.2 J800.2 J900.2 U100.5 XM600.12 XM600.18 XM600.19 XM600.25 XM700.12 XM700.18 XM700.19 XM700.25
copper on no net:
  other v2: 3600,1150 5800,1150 3600,4850 5800,4850

## Polygon pours and split planes (outlines as drawn)
GND_PWR on Top Layer "TOP POWAH GND" (solid, pour order 4): 3175,4550 1050,4550 1050,1450 3175,1450 3175,2600 2525,2600 2525,3400 3175,3400 3175,4550
GND on Top Layer "TOP GND" (solid, pour order 8): 6950,4950 2475,4950 2475,4600 3225,4600 3225,3350 2575,3350 2575,2650 3225,2650 3225,1400 2475,1400 2475,1050 6950,1050 6950,4950
GND_PWR on Bottom Layer "BOTTOM POWAH GND" (solid, pour order 6): 3175,4550 1050,4550 1050,1450 3175,1450 3175,2600 2525,2600 2525,3400 3175,3400 3175,4550
GND on Bottom Layer "BOTTOM GND" (solid, pour order 10): 6950,4950 2475,4950 2475,4600 3225,4600 3225,3350 2575,3350 2575,2650 3225,2650 3225,1400 2475,1400 2475,1050 6950,1050 6950,4950

## Silkscreen, mask and mechanical layers (free items; w line width, h text height)
Top Overlay:
  lines w10: 1000,3000 3500,3000 ; 3500,1000 3500,3000 ; 3500,5000 3500,3000

## Text inside footprints (layer, text, board x,y; h text height)
C1: Top Overlay "+" at 1700,3031 h118.11
C2: Top Overlay "+" at 3450,925 h118.11
C3: Top Overlay "+" at 3450,4575 h118.11
CN7: Top Overlay "37" at 3530,4310 h50 r180; Top Overlay "38" at 3528,4128 h50 r180; Top Overlay "1" at 5490,4220 h50 r180; Top Overlay "2" at 5500,4120 h50 r180
CN10: Top Overlay "37" at 3530,1910 h50 r180; Top Overlay "38" at 3528,1728 h50 r180; Top Overlay "1" at 5490,1820 h50 r180; Top Overlay "2" at 5500,1720 h50 r180
J200: Top Overlay "1" at 6505,1675 h39.37 r270; Top Overlay "6" at 6705,2100 h39.37 r270
J601: Top Overlay "1" at 1280,1865 h39.37 r270; Top Overlay "6" at 1369.68,1507.83 h39.37 r270
J602: Top Overlay "6" at 1613.54,2486.57 h39.37 r270; Top Overlay "1" at 1390,2765 h39.37 r270
J701: Top Overlay "1" at 1300,4065 h39.37 r270; Top Overlay "6" at 1389.68,3707.83 h39.37 r270
J702: Top Overlay "6" at 1613.54,4691.57 h39.37 r270; Top Overlay "1" at 1390,4970 h39.37 r270